# Altium PCB INVERTER_Logic_withCutout.pcbdoc
Units mm, origin at the board's own origin, x right, y up, seen from the top; angles counter-clockwise.
Board outline 118.77 x 58.36 mm, 2 copper layers (Top Layer, Bottom Layer), stack 1.66 mm thick; 158 components, 178 nets, 520 pads, 155 vias.
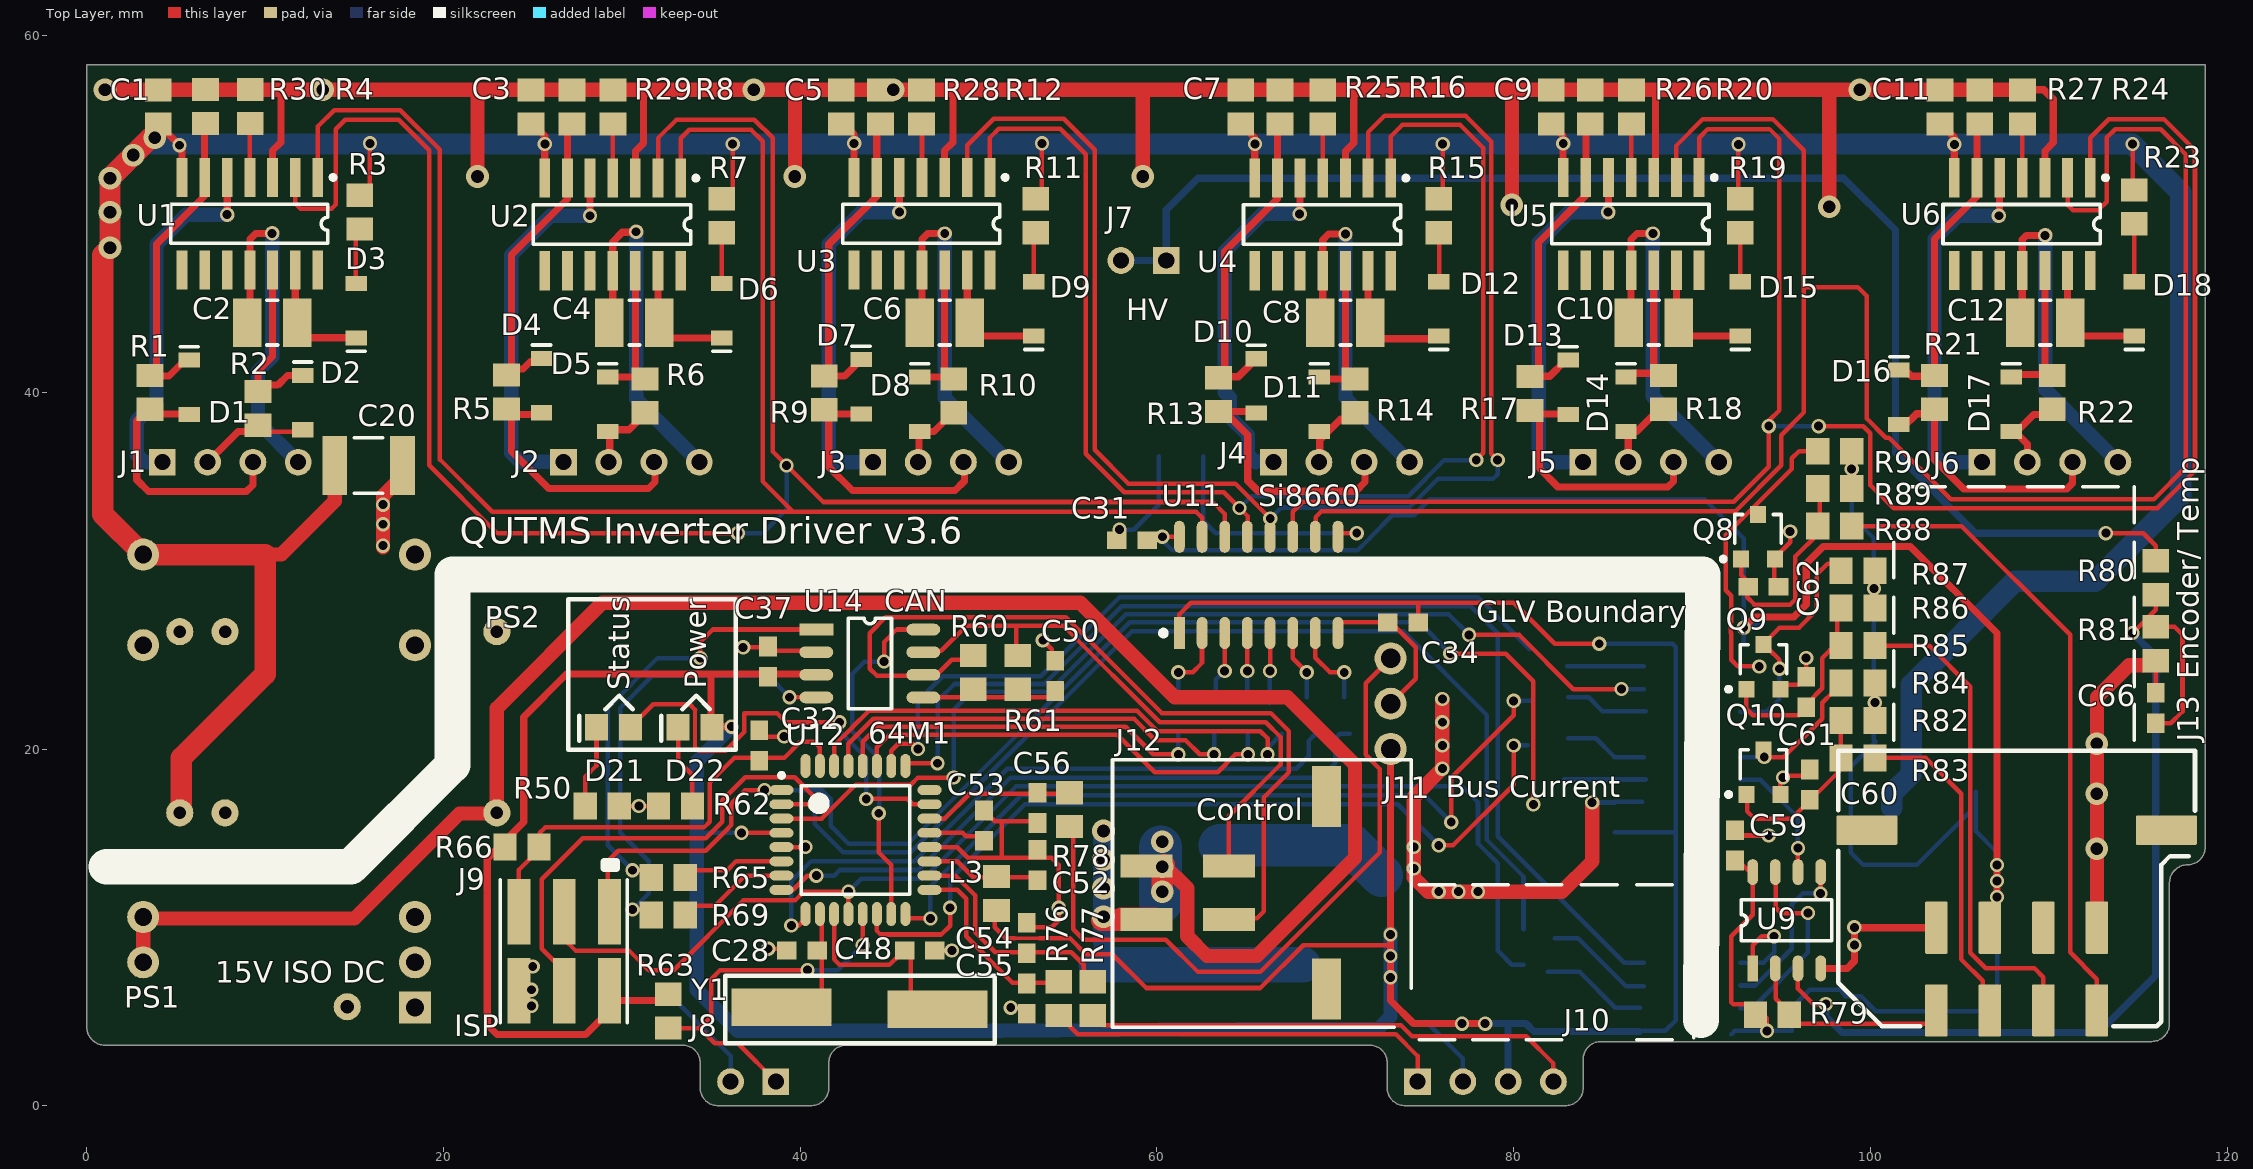
[diagram p0: Top Layer view]
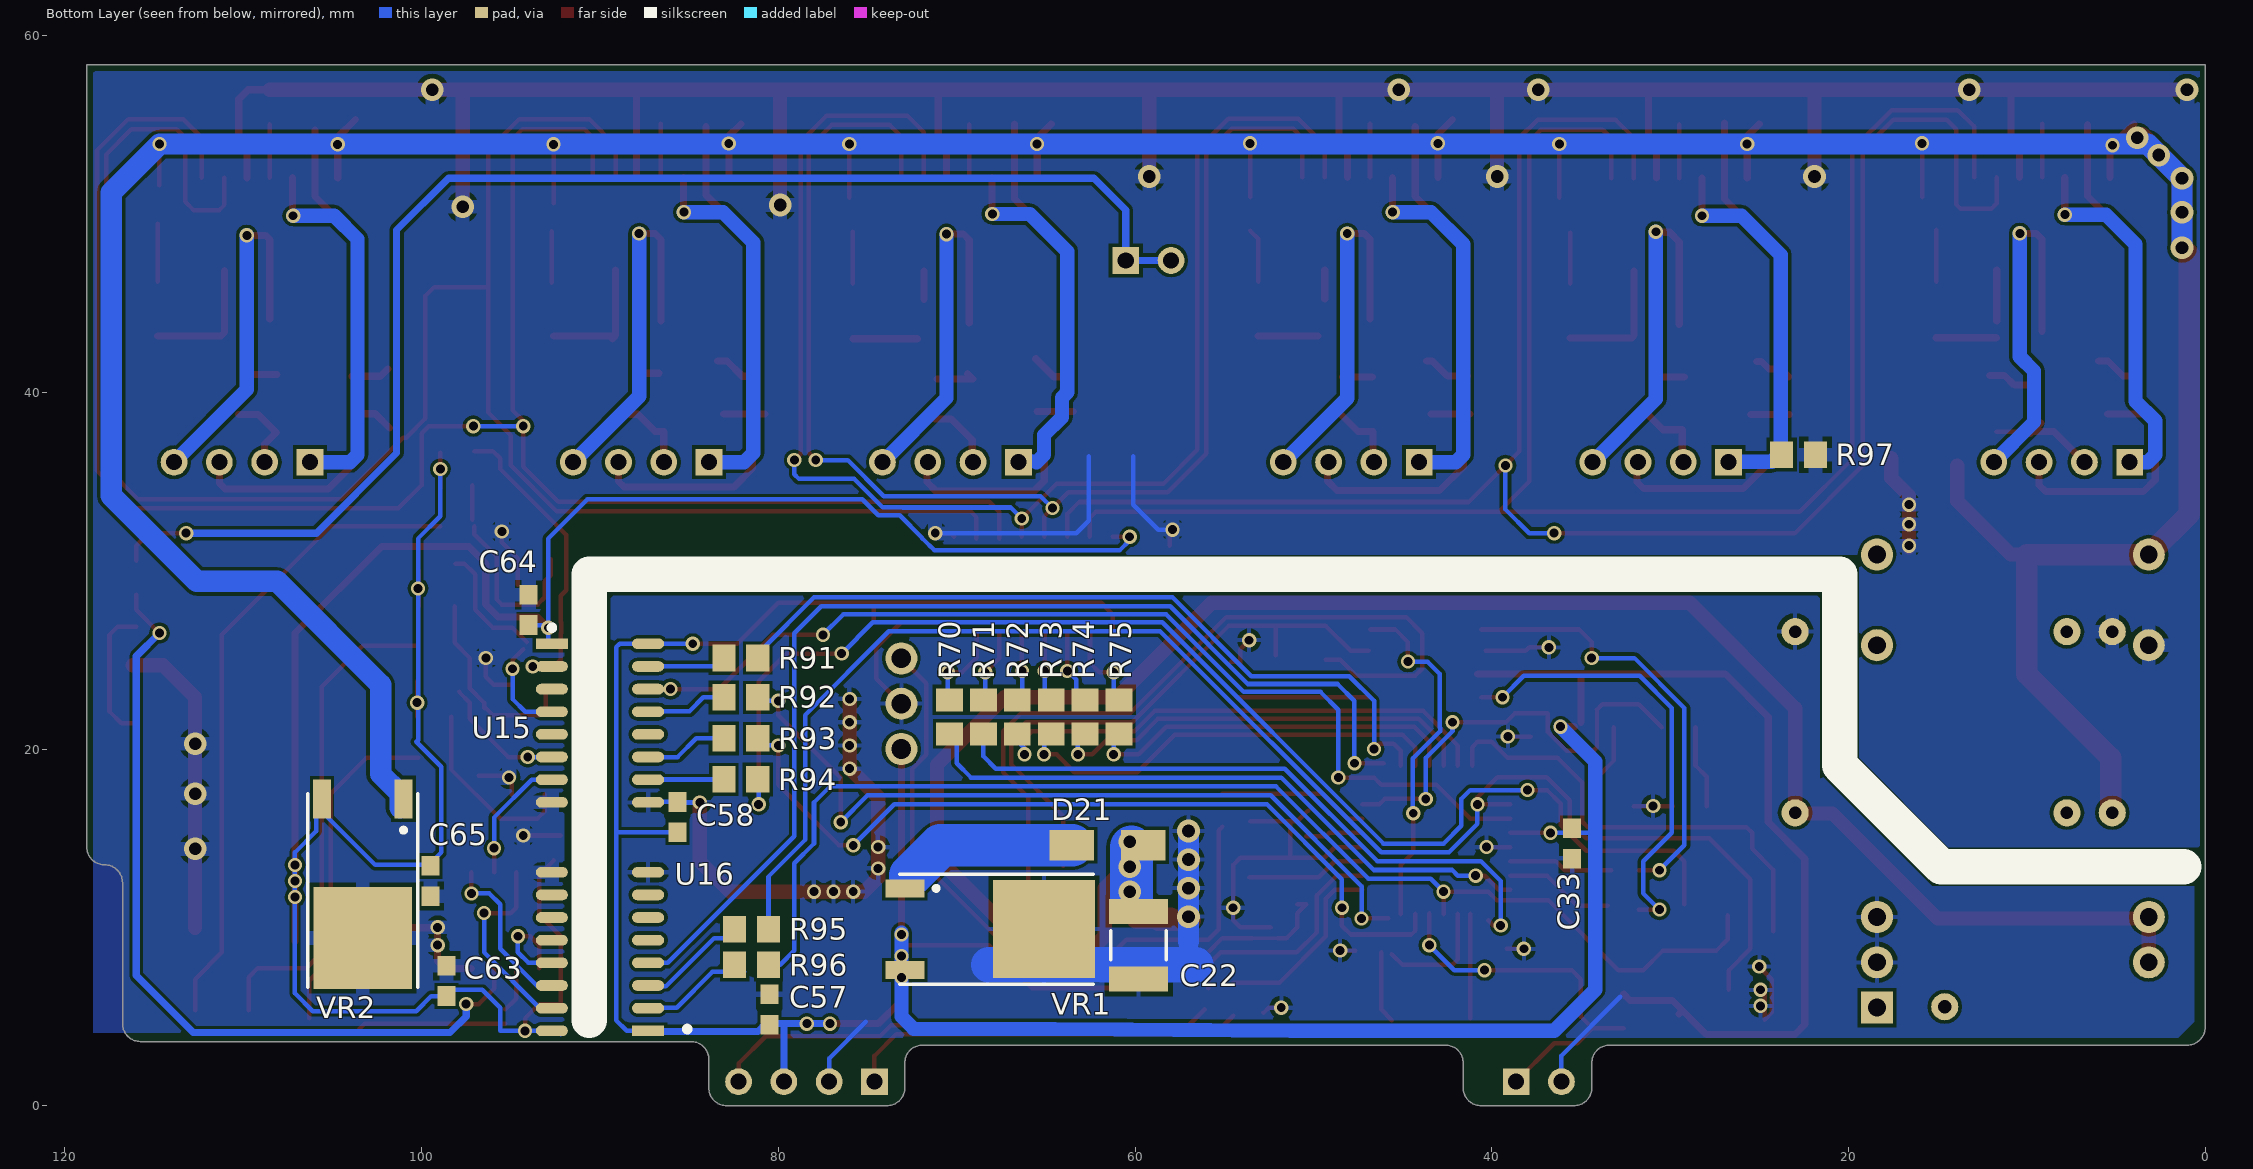
[diagram p1: Bottom Layer view, seen from below]

## Layer stack, top to bottom
Top Solder: solder mask 0.0102, Solder Resist, Dk 3.5
Top Layer: signal copper 0.07
Dielectric1: core 1.52, FR-4, Dk 4.8
Bottom Layer: signal copper 0.07
Bottom Solder: solder mask 0.0102, Solder Resist, Dk 3.5

## Board outline
34.39,1 ccw(c35.39,1) 35.39,0 40.6,0 ccw(c40.6,1) 41.6,1 41.6,2.4 cw(c42.6,2.4) 42.6,3.4 71.91,3.4 cw(c71.91,2.4) 72.91,2.4 72.91,1 ccw(c73.91,1) 73.91,0 82.9,0 ccw(c82.9,1) 83.9,1 83.9,2.6 cw(c84.9,2.6) 84.9,3.6 115.77,3.6 ccw(c115.77,4.6) 116.77,4.6 116.77,12.5 cw(c117.77,12.5) 117.77,13.5 ccw(c117.77,14.5) 118.77,14.5 118.77,58.36 0,58.36 0,4.4 ccw(c1,4.4) 1,3.4 33.39,3.4 cw(c33.39,2.4) 34.39,2.4

## Design rules (kind name [scope] priority, off if disabled: settings)
Clearance "Shrimp Clear" [InComponent('CS3')] p1: gap=1
Clearance [All] p2: gap=0.19
Height [All] p1: minheight=0 maxheight=30 prefheight=12.7
HoleSize [All] p1: absolutevalues=TRUE maxlimit=10 minlimit=0.025 maxpercent=80.000 minpercent=20.000
MinimumSolderMaskSliver [All] p1: minsoldermaskwidth=0.16
PlaneClearance [All] p1: clearance=1
PlaneConnect [All] p1: planeconnectstyle=Direct reliefexpansion=0.508 reliefentries=4 reliefconductorwidth=0.254 reliefairgap=0.254
PolygonConnect GLV_ground_connect [InNet('GND_GLV')] p1: connectstyle=Relief reliefconductorwidth=0.254 reliefentries=4 polygonreliefangle="90 Angle" airgapwidth=0.254
PolygonConnect "Rear Cap Connect" [(InNet('HV_NEG') AND (InComponent('C30') OR InComponent('C31') OR InComponent('C32') OR InComponent('C33') OR InComponent('C34') OR InComponent('C35') OR InComponent('C36') OR InComponent('C37') OR InComponent('C38') OR InComponent('C39') OR InComponent('C40') OR InComponent('C41') OR InComponent('C42') OR InComponent('C43') OR InComponent('C44') OR InComponent('C45') OR InComponent('C46') OR InComponent('C47') OR InComponent('C48') OR InComponent('C49') OR InComponent('C50') OR InComponent('C51') OR InComponent('C52') OR InComponent('C53') OR InComponent('C54') OR InComponent('C55') OR InComponent('C56') OR InComponent('C57')))] p2: connectstyle=Relief reliefconductorwidth=0.254 reliefentries=4 polygonreliefangle="90 Angle" airgapwidth=0.254
PolygonConnect [All] p3: connectstyle=Relief reliefconductorwidth=0.8 reliefentries=4 polygonreliefangle="90 Angle" airgapwidth=0.254
RoutingVias [All] p1: holewidth=0.5 width=0.8 viastyle="Through Hole" minholewidth=0.5 minwidth=0.8 maxholewidth=10 maxwidth=10
SilkToSilkClearance [All] p1: silktosilkclearance=0.16
SilkToSolderMaskClearance SilkscreenOverComponentPads [IsPad] p1: minsilkscreentomaskgap=0.16 clearancetoexposedcopper=TRUE
SolderMaskExpansion [IsVia] p1: expansion=-1
Width [All] p1: maxlimit=10 minlimit=0.2 preferedwidth=0.254
23 further rules are at their usual default settings.

## Components (designator, comment, footprint, x,y, rotation, side; value= is the part's Value field where it differs from the comment)
C1 "0805 1uF cer" 2012[0805]#1 4,56 r270 top
C2 "1210 3.3uF 50V" 3225[1210] 10.4,43.9 r180 top
C3 "0805 1uF cer" 2012[0805]#1 24.9,56 r270 top
C4 "1210 3.3uF 50V" 3225[1210] 30.7,43.9 r180 top
C5 "0805 1uF cer" 2012[0805]#1 42.3,56 r270 top
C6 "1210 3.3uF 50V" 3225[1210] 48.095,43.9 r180 top
C7 "0805 1uF cer" 2012[0805]#1 64.7,56 r270 top
C8 "1210 3.3uF 50V" 3225[1210] 70.565,43.9 r180 top
C9 "0805 1uF cer" 2012[0805]#1 82.1,56 r270 top
C10 "1210 3.3uF 50V" 3225[1210] 87.855,43.9 r180 top
C11 "0805 1uF cer" 2012[0805]#1 103.9,56 r270 top
C12 "1210 3.3uF 50V" 3225[1210] 109.8,43.9 r180 top
C20 "Comment" 1812 15.8,35.9 r0 top
C22 "1812 2.2uF 25V" 1812 59.8,9 r270 bottom
C28 "0603 18pF" 1608[0603] 40.1,8.7 r0 top
C31 "0603 18pF" 1608[0603] 58.6,31.7 r0 top
C32 "0603 18pF" 1608[0603] 37.7,20.2 r270 top
C33 "0603 18pF" 1608[0603] 35.5,14.7 r90 bottom
C34 "0603 18pF" 1608[0603] 73.8,27.1 r0 top
C37 "Comment" 1608[0603] 38.2,24.9 r270 top
C48 "0603 18pF" 1608[0603] 46.7,8.7 r0 top
C50 "Comment" 1608[0603] 54.3,24.1 r270 top
C52 "Comment" 1608[0603] 53.3,13.5 r270 top
C53 "Comment" 1608[0603] 50.3,15.7 r270 top
C54 "Comment" 1608[0603] 52.7,9.4 r270 top
C55 "Comment" 1608[0603] 52.7,6 r270 top
C56 "Comment" 1608[0603] 53.3,16.7 r270 top
C57 "Comment" 1608[0603] 80.5,5.4 r90 bottom
C58 "Comment" 1608[0603] 85.66,16.18 r270 bottom
C59 "Comment" 1608[0603] 92.4,14.6 r90 top
C60 "Comment" 1608[0603] 96.6,18 r270 top
C61 "Comment" 1608[0603] 96.4,23.2 r270 top
C62 "Comment" 1608[0603] 94,29.1 r180 top
C63 "Comment" 1608[0603] 98.6,7 r270 bottom
C64 "Comment" 1608[0603] 94,27.8 r270 bottom
C65 "Comment" 1608[0603] 99.5,12.6 r270 bottom
C66 "Comment" 1608[0603] 116,22.3 r270 top
D1 "RF071M2S" 0402 5.74,41.16 r270 top
D2 "RF071M2S" 0402 12.1,40.3 r270 top
D3 "RF071M2S" 0402 15.1,43.7 r90 top
D4 "RF071M2S" 0402 25.49,41.25 r270 top
D5 "RF071M2S" 0402 29.2,40.2 r270 top
D6 "RF071M2S" 0402 35.6,43.7 r90 top
D7 "RF071M2S" 0402 43.41,41.18 r270 top
D8 "RF071M2S" 0402 46.7,40.2 r270 top
D9 "RF071M2S" 0402 53.1,43.8 r90 top
D10 "RF071M2S" 0402 65.57,41.23 r270 top
D11 "RF071M2S" 0402 69.1,40.2 r270 top
D12 "RF071M2S" 0402 75.8,43.8 r90 top
D13 "RF071M2S" 0402 83.06,41.16 r270 top
D14 "RF071M2S" 0402 86.3,40.2 r270 top
D15 "RF071M2S" 0402 92.7,43.8 r90 top
D16 "RF071M2S" 0402 101.6,40.6 r270 top
D17 "RF071M2S" 0402 107.9,40.2 r270 top
D18 "RF071M2S" 0402 114.8,43.8 r90 top
D21 "Comment" 2012[0805]#2 62.8,14.6 r180 bottom
D21 "0805 Red LED" 2012[0805]#1 29.526,21.221 r0 top
D22 "0805 Grn LED" 2012[0805]#1 34.098,21.221 r0 top
J1 "A26416-ND" HDR1X4 4.23,36.08 r0 top locked
J2 "A26416-ND" HDR1X4 26.72,36.08 r0 top
J3 "A26416-ND" HDR1X4 44.07,36.08 r0 top
J4 "A26416-ND" HDR1X4 66.54,36.08 r0 top
J5 "A26416-ND" HDR1X4 83.88,36.08 r0 top
J6 "A26416-ND" HDR1X4 106.26,36.08 r0 top
J7 "A32932-ND" HDR1X2 60.52,47.39 r180 top locked
J8 "A32932-ND" HDR1X2 38.63,1.35 r180 top locked
J9 "ISP" SOT23-6 27,9.1 r180 top
J10 "A26416-ND" HDR1X4 74.61,1.35 r0 top locked
J11 "Bus Current" MOLEX_22-05-3081 73.1,20 r180 top locked
J12 "43045-0418" SO8 71.4,8.6 r90 top
J13 "Comment" MOLEX_8PIN_RA_SMD 108.2,10.4 r0 top
L3 "0805 10uH" 2012[0805]#1 51,11.9 r90 top
PS1 "15V ISO DC" DC/DC_JSE08 14.1,21.5 r270 top
PS2 "Comment" Recom_DIP24 18.4,5.5 r180 top
Q8 "2N7002" SOT-23 93.7,31.9 r0 top
Q9 "2N7002" SOT-23 94,24.6 r0 top
Q10 "2N7002" SOT-23 94,18.7 r0 top
R1 "0805 22R" 2012[0805]#1 3.54,40 r270 top
R2 "0805 22R" 2012[0805]#1 9.6,39.1 r90 top
R3 "0805 10R" 2012[0805]#1 15.3,50.1 r90 top
R4 "0805 100k" 2012[0805]#1 9.16,56.02 r90 top
R5 "0805 22R" 2012[0805]#1 23.53,40.02 r270 top
R6 "0805 22R" 2012[0805]#1 31.3,39.8 r90 top
R7 "0805 10R" 2012[0805]#1 35.6,49.9 r90 top
R8 "0805 100k" 2012[0805]#1 29.5,56 r90 top
R9 "0805 22R" 2012[0805]#1 41.35,39.97 r270 top
R10 "0805 22R" 2012[0805]#1 48.6,39.8 r90 top
R11 "0805 10R" 2012[0805]#1 53.2,49.9 r90 top
R12 "0805 100k" 2012[0805]#1 46.8,56 r90 top
R13 "0805 22R" 2012[0805]#1 63.45,39.87 r270 top
R14 "0805 22R" 2012[0805]#1 71.1,39.8 r90 top
R15 "0805 10R" 2012[0805]#1 75.8,49.9 r90 top
R16 "0805 100k" 2012[0805]#1 69.3,56 r90 top
R17 "0805 22R" 2012[0805]#1 80.92,39.93 r270 top
R18 "0805 22R" 2012[0805]#1 88.4,40 r90 top
R19 "0805 10R" 2012[0805]#1 92.7,49.9 r90 top
R20 "0805 100k" 2012[0805]#1 86.6,56 r90 top
R21 "0805 22R" 2012[0805]#1 103.6,40 r270 top
R22 "0805 22R" 2012[0805]#1 110.2,40 r90 top
R23 "0805 10R" 2012[0805]#1 114.8,50.4 r90 top
R24 "0805 100k" 2012[0805]#1 108.53,56 r90 top
R25 "0805 100k" 2012[0805]#1 66.9,56 r90 top
R26 "0805 100k" 2012[0805]#1 84.3,56 r90 top
R27 "0805 100k" 2012[0805]#1 106.13,56 r90 top
R28 "0805 100k" 2012[0805]#1 44.5,56 r90 top
R29 "0805 100k" 2012[0805]#1 27.2,56 r90 top
R30 "0805 100k" 2012[0805]#1 6.66,56.02 r90 top
R50 "Comment" 2012[0805]#1 28.9,16.8 r0 top
R60 "Comment" 2012[0805]#1 49.7,24.3 r270 top
R61 "Comment" 2012[0805]#1 52.2,24.3 r270 top
R62 "Comment" 2012[0805]#1 33,16.8 r180 top
R63 "0805 270R" 2012[0805]#1 32.6,5.3 r90 top
R65 "0805 270R" 2012[0805]#1 32.6,12.8 r180 top
R66 "0805 270R" 2012[0805]#1 24.4,14.5 r0 top
R69 "0805 270R" 2012[0805]#1 32.6,10.7 r180 top
R70 "Comment" 2012[0805]#1 70.4,21.8 r90 bottom
R71 "Comment" 2012[0805]#1 68.5,21.8 r90 bottom
R72 "Comment" 2012[0805]#1 66.6,21.8 r90 bottom
R73 "Comment" 2012[0805]#1 64.7,21.8 r90 bottom
R74 "Comment" 2012[0805]#1 62.8,21.8 r90 bottom
R75 "Comment" 2012[0805]#1 60.9,21.8 r90 bottom
R76 "Comment" 2012[0805]#1 54.5,6 r270 top
R77 "Comment" 2012[0805]#1 56.4,6 r270 top
R78 "Comment" 2012[0805]#1 55.1,16.6 r270 top
R79 "Comment" 2012[0805]#1 94.5,5.1 r180 top
R80 "Comment" 2012[0805]#1 116,29.6 r90 top
R81 "Comment" 2012[0805]#1 116,25.9 r90 top
R82 "Comment" 2012[0805]#1 99.3,21.6 r180 top
R83 "Comment" 2012[0805]#1 99.3,19.5 r180 top
R84 "Comment" 2012[0805]#1 99.3,23.7 r180 top
R85 "Comment" 2012[0805]#1 99.3,25.8 r180 top
R86 "Comment" 2012[0805]#1 99.3,27.9 r180 top
R87 "Comment" 2012[0805]#1 99.3,30 r180 top
R88 "Comment" 2012[0805]#1 98,32.5 r180 top
R89 "Comment" 2012[0805]#1 98,34.6 r180 top
R90 "Comment" 2012[0805]#1 98,36.7 r180 top
R91 "Comment" 2012[0805]#1 82.1,25.1 r180 bottom
R92 "Comment" 2012[0805]#1 82.1,22.9 r180 bottom
R93 "Comment" 2012[0805]#1 82.1,20.6 r180 bottom
R94 "Comment" 2012[0805]#1 82.1,18.3 r180 bottom
R95 "Comment" 2012[0805]#1 81.5,9.9 r180 bottom
R96 "Comment" 2012[0805]#1 81.5,7.9 r180 bottom
R97 "Comment" 2012[0805]#1 22.8,36.5 r180 bottom
U1 "FAN73933" SOIC16 8.51,49.45 r180 top
U2 "FAN73933" SOIC16 28.85,49.41 r180 top
U3 "FAN73933" SOIC16 46.19,49.45 r180 top
U4 "FAN73933" SOIC16 68.66,49.41 r180 top
U5 "FAN73933" SOIC16 85.95,49.44 r180 top
U6 "FAN73933" SOIC16 107.88,49.43 r180 top
U9 "MCP3002" MCP3002_SO8 93.4,7.7 r90 top
U11 "Si8660" SOP16_SINARROW 61.26,26.5 r90 top locked
U12 "64M1" 32A_L 43.1,14.9 r0 top locked
U14 "CAN" SOP8_TJA1040 40.9,26.7 r0 top
U15 "Si8661" SOP16_SINARROW 92.7,25.9 r180 bottom
U16 "Si8661" SOP16_SINARROW 87.3,4.2 r0 bottom
VR1 "78M05" 369A-13 68.8,9.9 r270 bottom
VR2 "78M05" 369A-13 103.3,13.1 r0 bottom
Y1 "16MHz ABLS" 2012[0805]#3 39.9,5.5 r0 top

## Footprints (in the part's own frame and the unit in brackets; to place one, negate y for a bottom-side part, rotate by r counter-clockwise, add the part's x,y. Pads: shape width x height; smd on the part's side, far side on the other; paste and mask are expansions set on the pad)
32A_L [mm] "Thin QFP, 32-Leads, Body 7x7mm, Pitch 0.8mm, IPC High Density"
  oval 1.35x0.55 smd: 1(-4.15,2.8) 2(-4.15,2) 3(-4.15,1.2) 4(-4.15,0.4) 5(-4.15,-0.4) 6(-4.15,-1.2) 7(-4.15,-2) 8(-4.15,-2.8) 17(4.15,-2.8) 18(4.15,-2) 19(4.15,-1.2) 20(4.15,-0.4) 21(4.15,0.4) 22(4.15,1.2) 23(4.15,2) 24(4.15,2.8)
  oval 0.55x1.35 smd: 9(-2.8,-4.15) 10(-2,-4.15) 11(-1.2,-4.15) 12(-0.4,-4.15) 13(0.4,-4.15) 14(1.2,-4.15) 15(2,-4.15) 16(2.8,-4.15) 25(2.8,4.15) 26(2,4.15) 27(1.2,4.15) 28(0.4,4.15) 29(-0.4,4.15) 30(-1.2,4.15) 31(-2,4.15) 32(-2.8,4.15)
  silkscreen extent -4.27,-3.05 3.05,3.75, body extent -3.5,-3.5 3.5,3.5, height 1.2
369A-13 [mm] "TO, Flat Index; 3 In-Line, Axial Leads; Body Dia. 4.6mm; Lead Dia. 0.5 mm (max)"
  rect 1x2.2 smd: 1(-2.285,-4.1) 3(2.285,-4.1)
  rect 5.5x5.7 smd: 4(0,3.7)
  silkscreen extent -3.09,-4.4 3.08,6.45
0402 [mm] "Chip Capacitor; Body 1.0 x 0.5 mm (LxW typ)"
  rect 0.85x1.2 smd: 1(-0.65,0) 2(2.4,0)
  silkscreen extent -1.4,-0.51 -1.4,0.51
1608[0603] [mm] "Chip Capacitor; Body 1.6 x 0.8 mm (LxW typ)"
  rect 1.1x1 smd: 1(-0.85,0) 2(0.85,0)
1812 [mm] "Chip Capacitor, Body 4.5x3.2mm, IPC High Density"
  rect 1.4x3.3 smd: 1(-1.9,0) 2(1.9,0)
  silkscreen extent -0.8,-1.55 0.8,1.55, body extent -2.4,-1.7 2.4,1.7, height 1.4
2012[0805]#1 [mm] "Chip Resistor; Body 2.0 x 1.3 mm (LxW typ)"
  rect 1.3x1.5 smd: 1(-0.95,0) 2(0.95,0)
2012[0805]#2 [mm] "Chip Resistor; Body 2.0 x 1.3 mm (LxW typ)"
  rect 2.5x1.7 smd: 1(-0.74,-0.004) 2(3.26,-0.004)
2012[0805]#3 [mm] "Crystal, Thru-Hole; 2 Leads; Body 3.1 x 8.2 mm (Dia.xH)"
  rect 5.6x2.1 smd: 1(-0.95,0.025) 2(7.8,-0.1)
3225[1210] [mm] "Chip Resistor; Body 3.2 x 2.5 mm (LxW typ)"
  rect 1.6x2.7 smd: 1(-1.4,0) 2(1.4,0)
  silkscreen extent -0.3,-1.25 0.3,1.25
DC/DC_JSE08 [mil]
  round 60 hole 27.56: 1(-200,350) 7(-200,-250) 8(-200,-350) 9(200,-350) 10(200,-250) 16(200,350)
  body extent -273,-470 272,470, height 319
HDR1X2 [mm] "Connector; Header; 2 Position"
  rect 1.5x1.5 hole 0.9: 1(0,0)
  round 1.5 hole 0.9: 2(2.54,0)
HDR1X4 [mm] "Connector; Header; 4 Position"
  rect 1.5x1.5 hole 0.9: 1(0,0)
  round 1.5 hole 0.9: 2(2.54,0) 3(5.08,0) 4(7.62,0)
MCP3002_SO8 [mm]
  rect 1.45x0.6 smd: 1(0,0)
  oval 1.45x0.6 smd: 2(0,-1.27) 3(0,-2.54) 4(0,-3.81) 5(5.4,-3.81) 6(5.4,-2.54) 7(5.4,-1.27) 8(5.4,0)
  silkscreen extent 1.56,-4.44 3.84,0.64, body extent -0.4,-4.4 5.8,0.6, height 1.75
MOLEX_8PIN_RA_SMD [mm]
  rrect10% 1.27x2.92 smd: 1(-4.5,-0.42) 2(-1.5,-0.42) 3(1.5,-0.42) 4(4.5,-0.42) 5(-4.5,-5.05) 6(-1.5,-5.05) 7(1.5,-5.05) 8(4.5,-5.05)
  rrect10% 3.43x1.65 smd: ""(-8.395,5.05) ""(8.395,5.05)
  silkscreen extent -10,-5.95 10,9.5, body extent -9.82,-5.77 9.83,9.63, height 8.78
MOLEX_22-05-3081 [mm]
  round 1.8 hole 1.1: 1(0,0) 2(0,-2.54) 3(0,-5.08)
  body extent -12.63,-6.27 0.3,1.2, height 6.38
Recom_DIP24 [mm] "945-1367-ND"
  rect 1.8x1.8 hole 1: 1(0,0)
  round 1.8 hole 1: 2(0,-2.54) 3(0,-5.08) 9(0,-20.32) 11(0,-25.4) 14(15.24,-25.4) 16(15.24,-20.32) 22(15.24,-5.08) 23(15.24,-2.54)
SO8 [mm] "SOP, 8-Leads, Body 5.3x5.3mm, Pitch 1.27mm, IPC High Density"
  rect 1.27x2.92 smd: 1(4.844,7.366) 2(1.844,7.366) 3(4.844,11.996) 4(1.844,11.996)
  rect 3.43x1.65 smd: ""(-2.051,1.896) ""(8.739,1.896)
  silkscreen extent -4.19,-2.87 10.79,13.9
SOIC16 [mm] "Small Outline; 16 Leads; Body Width 3.9 mm; Pitch 1.27 mm"
  rect 0.6x2.2 smd: 1(-4.445,-2.6) 2(-3.175,-2.6) 3(-1.905,-2.6) 4(-0.635,-2.6) 5(0.635,-2.6) 6(1.905,-2.6) 7(3.175,-2.6) 8(3.175,2.6) 9(1.905,2.6) 10(0.635,2.6) 11(-0.635,2.6) 12(-1.905,2.6) 13(-3.175,2.6) 14(-4.445,2.6)
  silkscreen extent -5.42,-2.72 3.81,1.1
SOP8_TJA1040 [mm]
  rect 1.9x0.65 smd: 1(0,0)
  oval 1.9x0.65 smd: 2(0,-1.27) 3(0,-2.54) 4(0,-3.81) 5(6,-3.81) 6(6,-2.54) 7(6,-1.27) 8(6,0)
  silkscreen extent 1.78,-4.44 4.22,0.64, body extent -0.17,-4.4 6.03,0.6, height 1.75
SOP16_SINARROW [mm]
  rect 1.8x0.6 smd: 1(0,0)
  oval 1.8x0.6 smd: 2(0,-1.27) 3(0,-2.54) 4(0,-3.81) 5(0,-5.08) 6(0,-6.35) 7(0,-7.62) 8(0,-8.89) 9(5.4,-8.89) 10(5.4,-7.62) 11(5.4,-6.35) 12(5.4,-5.08) 13(5.4,-3.81) 14(5.4,-2.54) 15(5.4,-1.27) 16(5.4,0)
  silkscreen extent -0.1,0.8 0.1,1, body extent -0.38,-9.54 5.78,0.54, height 2
SOT23-6 [mm] "SOT-23/SC-74A; 5 Leads; Body 3.1 x 3 mm, inc. leads (LxW max)"
  rect 1.27x3.68 smd: 1(-2.308,-1.78) 2(-2.308,2.66) 3(0.232,-1.78) 4(0.232,2.66) 5(2.772,-1.78) 6(2.772,2.66)
  silkscreen extent -3.3,-3.56 3.81,4.45
SOT-23 [mm] "SOT-23; 3 Leads; Body 3.0 x 2.6 mm, inc. leads (LxW max)"
  rect 0.9x0.95 smd: 1(-0.95,-1.25) 2(0.95,-1.25) 3(0,1.25)
  silkscreen extent -2.07,-1.37 1.3,1.25

## Part data
C20 C22: library part "Cap Pol3"
J1 J2 J3 J4 J5 J6 J10: library part "Header 4"
J7 J8: library part "Header 2"
J12: library part "SW DIP-4"
J13: library part 8_pin_header
PS1: library part DC_DC_JSE08
U11 U15 U16: library part Si-8660
U12: library part ATtiny28L-4AI
U14: library part TJA1040
Y1: library part "Res Semi"

## Free pads (board coordinates)
  round 1.524 hole 0.762: 0(14.6,5.55)

## Via types
v1: diameter 0.8, hole 0.5, Top Layer to Bottom Layer, 130 vias
v2: diameter 1.27, hole 0.711, Top Layer to Bottom Layer, 25 vias

## Nets (pads, with @x,y where several pads share a name; then routed paths per layer and width w, separated by ;. In a path a pad name is that pad's centre, name@x,y a point inside that pad or via, vN(x,y) a via of type N, cw(c..) or ccw(c..) an arc to the next point about the centre after c; other vN are vias at no path point)
5V_GLV: C33.2 C34.2 C37.2 C57.1 C58.2 D22.2 J9.2 J10.3 J11.1 L3.1 R63.2 R66.1 U11.1 U12.4 U14.3 U15.16 U16.1 VR1.3 | length 233.7
  Top Layer w0.2: 52.023,9.402 53.4,9.4
  Top Layer w0.254: D22.2@35,21.5 D22.2@35.048,21.548 ; v1(36.7,15.3) U12.4 ; L3.1@50.9,11.3 50.4,11.3 50.9,10.8 50.9,10 51.498,9.402 52.023,9.402 ; 53.4,9.4 55.1,9.4 56,8.5 57.5,8.5 59.4,6.6 65.8,6.6 68.2,9 73.1,9 ; U11.1 61.26,27.56 61.9,28.2 80,28.2 82.3,25.9 v1(84.8,25.9) ; C34.2 74.65,28.15
  Top Layer w0.4: J9.2@29.308,5.34 J9.2@29.5,5.148 ; R63.2 32.25,5.9 29.868,5.9 27.968,4 23,4 22.45,4.55 22.45,13.85 24.5,15.9 24.5,21.8 26.9,24.2 U14.3@40.8,24.2 ; D22.2@35,21.5 35,24.2 ; D22.2@35.351,21.251 v1(36.149,21.251) ; J11.1 73.1,5.9 74.4,4.6 v1(78.4,4.6)
  Bottom Layer w0.254: 34,15.3 v1(36.7,15.3) ; v1(84.8,25.9) 88.9,25.9 89.1,25.7 89.1,4.8 88.5,4.2 U16.1 ; C58.2 89.07,15.33
  Bottom Layer w0.4: v1(77.1,4.6) 79.69,4.6 ; J10.3@79.5,1.5 79.69,1.31 79.69,4.6 ; U16.1@87.06,4.16 81.14,4.16 80.7,4.6 79.69,4.6
  Bottom Layer w0.8: v1(36.149,21.251) 34.2,19.302 34.2,6.5 36.5,4.2 51.3,4.2 64.5,4.3 72.4,4.3 73.1,5 v1@73.1,9.7
  other v1: 73.1,7.2 73.1,8.4 73.1,9.6
5V_HV: C31.2 C59.1 C63.2 C64.2 C65.1 J13.2 R79.2 R82.1 R84.1 R86.1 R87.1 R89.1 R90.1 U9.8 U11.16 U15.1 U16.16 VR2.3 | length 157.8
  Top Layer w0.254: v1(60.3,31.9) U11.16 ; C59.1@92.6,13.75 93.4,12.95 93.4,10.7 92.2,9.5 92.2,5.8 92.3,5.7 93.4,5.7 94.2,4.9 v1@94.2,4 ; R89.1 R90.1@98.95,36.6 ; R86.1@100.15,28 R87.1@100.15,30 ; R82.1@100.25,21.8 R84.1@100.25,23.8
  Top Layer w0.4: v1(92.9,26.8) 93.5,27.4 95.7,27.4 96.4,28.1 96.4,30.4 97.36,31.36 102.24,31.36 107.1,26.5 J13.2@107.1,9.2
  Bottom Layer w0.254: v1(60.3,31.9) 60.3,31.7 60.844,31.156 71.256,31.156 71.483,31.383 71.497,31.383 71.917,31.803 71.917,31.817 73.2,33.1 74.4,33.1 75.3,34 90.7,34 92.9,31.8 v1(92.9,26.8) ; U16.16@92.21,4.01 92.4,4.2 95.6,4.2 95.6,5.5 96.6,6.5 98.3,6.5 C63.2@98.6,6.2 ; U15.1@92.9,26 92.9,26.604 93.246,26.95 C64.2 ; C63.2 99.45,6.15 100.3,5.3 106.1,5.3 107.1,6.3 107.1,14.2 105.9,15.4 VR2.3@105.9,17.6 ; v1(98.95,35.7) 98.95,33.05 100.2,31.8 100.2,20.5 100.3,20.4 98.9,19 98.9,14.2 99.6,13.5 102.6,13.5 VR2.3@105.5,16.4
  other v1: 94.2,4.2 107.1,11.7 107.1,12.6 107.1,13.5 100.25,22.6 100.2,29
12V_GLV: C22.1 D21.2@59.54,14.596 J12.3 PS1.16 PS2.22 PS2.23 | length 111.7
  Top Layer w0.8: PS2.23 3.16,10.66 3.32,10.5 15,10.5 20.89,16.39 22.99,16.39 22.99,22.29 28.9,28.2 55.7,28.2 61,22.9 67.317,22.9 71.1,19.117 71.1,13.9 65.6,8.4 62.8,8.4 61.7,9.5 61.7,12.2 J12.3@60.4,13.5
  Top Layer w1.2: v2(60.3,12) v2(60.3,13.4) J12.3@60.4,13.5
  Bottom Layer w2.4: C22.1@60.2,11.4 D21.2@60.2,14.5
  other v2: 60.3,14.8
12V_reg: D21.1@63.54,14.596 VR1.1 | length 9.8
  Bottom Layer w2.4: D21.1@63.54,14.6 70.9,14.6 72.6,12.9
15V: C1.2 C3.2 C5.2 C7.2 C9.2 C11.2 C20.1 PS1.9 PS2.14 R3.2 R7.2 R11.2 R15.2 R19.2 R23.2 U1.7 U2.7 U3.7 U4.7 U5.7 U6.7 VR2.1 | length 270.4
  Top Layer w0.254: R3.2@15.87,50.95 v1(15.87,53.96) ; R7.2@36.21,50.91 v1(36.21,53.92) ; R11.2@53.55,50.95 v1(53.55,53.96) ; R15.2@76.02,50.91 v1(76.02,53.92) ; R19.2@92.6,50.6 v1(92.6,53.9) ; R23.2@114.7,51.6 v1(114.7,53.92)
  Top Layer w0.4: C1.2 5.335,53.715 U1.7 ; C3.2@25,55.05 25.675,54.375 U2.7 ; C5.2@42.2,55.3 43.015,54.485 U3.7 ; C7.2 65.485,54.265 U4.7 ; C9.2 82.775,54.375 U5.7 ; C11.2@103.7,55.3 104.705,54.295 U6.7
  Top Layer w0.8: 0.9,33.2 3.2,30.9 10.9,30.9 13.9,33.9 C20.1
  Top Layer w1.2: 0.9,33.16 PS2.14 10,30.9 10,24.2 5.3,19.5 5.3,16.4 5.28,16.42 PS1.9 ; 0.9,33.2 0.9,47.7 v2(1.3,48.1) v2(1.3,52) 3.575,54.275 v2(3.8,54.275)
  Bottom Layer w1.2: v2(1.3,48.1) v2(1.3,52) 3.22,53.92 v1(65.49,53.92) 114.68,53.92 117.4,51.2 117.4,34.2 112.6,29.4 108.1,29.4 102.3,23.6 102.3,18.6 101.2,17.5 VR2.1@101.2,16.7
  other v1: 5.2,53.85 25.68,53.92 104.705,53.9 43.02,53.96 82.78,53.95
  other v2: 1.3,50.1 2.6,53.3
ADC_CS: U12.25 U16.4 | length 61.9
  Top Layer w0.254: U12.25@46.05,19.2 v1(47.7,19.2)
  Bottom Layer w0.254: v1(47.7,19.2) 47.7,22.7 48.644,23.644 53.672,23.644 58.028,28 77.6,28 79.1,26.5 79.1,15.1 86.19,8.01 U16.4
AGND: 
ANODE1: 
ANODE2: 
Aref: C53.2 U12.21 | length 3.2
  Top Layer w0.254: U12.21 49.1,15.3 49.3,15.1 C53.2@50.4,15.1
AVCC: C52.2 L3.2 U12.19 | length 6.7
  Top Layer w0.254: U12.19 48.8,13.7 49.7,12.8 C52.2@53.6,12.8
CAN_HI: J12.1 R61.1 U14.7 | length 33.2
  Top Layer w0.254: U14.7@46.9,25.5 47.9,25.5 49.3,26.9 54.758,26.9 60.158,21.5 66.1,21.5 66.928,20.672 66.928,19.128 64.034,16.234 J12.1 ; R61.1@52.1,25.25 52.1,26.8
CAN_LO: J12.2 R60.1 U14.6 | length 47.7
  Top Layer w0.254: R60.1@49.3,25 48.5,25 47.6,24.1 44.3,24.1 43.9,24.5 43.9,26.5 44.8,27.4 54.886,27.4 60.269,22.017 66.383,22.017 67.4,21 67.4,18.7 66,17.3 66,10.9 65.6,10.5 J12.2@63.6,10.5
CAN_SPLIT: C50.2 R60.2 R61.2 U14.5 | length 7.4
  Top Layer w0.254: U14.5 C50.2@54.3,22.89
CS_HV: U9.1 U16.13 | length 5.8
  Top Layer w0.254: U9.1 93.4,9 93.9,9.5 v1(94.6,9.5)
  Bottom Layer w0.254: U16.13 94.01,8.01 94.6,8.6 v1(94.6,9.5)
DTR_A: R4.1 U1.4 | length 3
  Top Layer w0.254: U1.4 R4.1@9.145,55.055
DTR_B: R8.1 U2.4 | length 3
  Top Layer w0.254: U2.4 R8.1@29.485,55.015
DTR_C: R12.1 U3.4 | length 3
  Top Layer w0.254: U3.4 R12.1@46.825,55.055
DTR_D: R16.1 U4.4 | length 3
  Top Layer w0.254: U4.4 R16.1@69.295,55.015
DTR_E: R20.1 U5.4 | length 3
  Top Layer w0.254: U5.4 R20.1@86.585,55.045
DTR_F: R24.1 U6.4 | length 3
  Top Layer w0.254: U6.4 R24.1@108.515,55.035
FBin: 
FBout: 
gate_U_HI_A: D2.2 J1.2 R2.1 | length 6.3
  Top Layer w0.254: R2.1@10,37.8 D2.2@11.7,37.8
  Top Layer w0.4: J1.2 8.49,37.8 9.6,37.8 R2.1@9.8,38 ; R2.1@9.22,38.28 R2.1@9.8,37.7
gate_U_HI_B: D5.2 J2.2 R6.1 | length 4.5
  Top Layer w0.4: J2.2@29.32,36.05 29.32,37.9 30.4,37.9 31.3,38.8 R6.1@31.3,39.1
gate_U_LO_A: D1.2 J1.3 R1.2 | length 14.5
  Top Layer w0.4: R1.2@3.3,38.79 D1.2@5.48,38.79 ; R1.2@3.395,38.995 2.8,38.4 2.8,35.1 3.46,34.44 8.94,34.44 9.31,34.81 J1.3
gate_U_LO_B: D4.2 J2.3 R5.2 | length 14.8
  Top Layer w0.4: R5.2@23.3,38.75 D4.2@25.49,38.75 ; R5.2@23.82,39.2 23.82,36.68 25.9,34.6 31.49,34.6 31.86,34.97 J2.3@31.86,36.05
gate_V_HI_A: D8.2 J3.2 R10.1 | length 3.8
  Top Layer w0.4: J3.2@46.66,36.09 D8.2@46.66,37.8 ; D8.2 47.5,37.8 R10.1@48.4,38.7
gate_V_HI_B: D11.2 J4.2 R14.1 | length 3.8
  Top Layer w0.4: J4.2@69.13,36.05 69.13,37.33 70.3,38.5 R14.1@71.2,38.5
gate_V_LO_A: D7.2 J3.3 R9.2 | length 14.8
  Top Layer w0.4: R9.2@41.23,38.79 D7.2@43.41,38.79 ; R9.2@41.6,39 41.6,35.82 42.93,34.49 48.68,34.49 49.2,35.01 J3.3@49.2,36.09
gate_V_LO_B: D10.2 J4.3 R13.2 | length 14.4
  Top Layer w0.4: R13.2 D10.2@65.48,38.92 ; R13.2@63.92,38.77 65.09,37.6 65.09,35.04 65.68,34.45 71.15,34.45 71.67,34.97 J4.3@71.67,36.05
gate_W_HI_A: D14.2 J5.2 R18.1 | length 3.9
  Top Layer w0.4: J5.2 D14.2@86.42,37.8 ; D14.2@86.5,37.8 86.9,37.8 87.87,38.77 R18.1@88.32,38.77
gate_W_HI_B: D17.2 J6.2 R22.1 | length 4.5
  Top Layer w0.4: J6.2 108.8,37.1 108.15,37.75 109.16,38.76 R22.1@110.25,38.76
gate_W_LO_A: D13.2 J5.3 R17.2 | length 14.2
  Top Layer w0.4: R17.2@80.75,38.78 D13.2@83.06,38.78 ; R17.2@81.44,38.51 81.44,35.73 82.47,34.7 88.66,34.7 88.96,35 J5.3
gate_W_LO_B: D16.2 J6.3 R21.2 | length 14.6
  Top Layer w0.4: D16.2@101.8,38 102.6,38.8 103.7,38.8 103.6,38.7 103.6,36.2 105.23,34.57 111.01,34.57 111.34,34.9 J6.3
gearbox_temp_a: 
gearbox_temp_b: J13.5 R79.1 U9.2 | length 10.8
  Top Layer w0.254: U9.2@94.7,7.67 94.7,6 R79.1@95.3,5.4 ; R79.1@95.3,4.6 103.2,4.6 J13.5@103.5,4.3
GND_A: J1.1 U1.5 | length 20.6
  Top Layer w0.4: v1@7.875,49.975 U1.5
  Bottom Layer w0.8: J1.1 3.22,36.08 2.8,36.5 2.8,38.4 3.9,39.5 3.9,48.3 5.56,49.96 v1(7.87,49.96)
GND_B: J2.1 R97.1 U2.5 | length 21.7
  Top Layer w0.4: J2.1@26.7,36.1 J2.1 ; v1(28.215,49.9) U2.5
  Bottom Layer w0.8: J2.1@26.7,36.1 24.3,36.1 23.8,36.6 23.8,47.7 26,49.9 v1@28.2,49.9
GND_C: J3.1 U3.5 | length 21.1
  Top Layer w0.4: v1(45.555,50.1) U3.5
  Bottom Layer w0.8: J3.1 42.02,36.08 41.6,36.5 41.6,48.3 43.4,50.1 v1(45.555,50.1)
GND_D: J4.1 U4.5 | length 20.5
  Top Layer w0.4: v1@68.025,50 U4.5
  Bottom Layer w0.8: J4.1@66.4,36.3 65.52,36.08 65.1,36.5 65.1,37.6 64.1,38.6 64.1,39.7 63.8,40 63.8,47.9 65.9,50 v1(68,50)
GND_E: J5.1 U5.5 | length 21
  Top Layer w0.4: v1@85.315,50.1 U5.5
  Bottom Layer w0.8: J5.1 81.92,36.08 81.4,36.6 81.4,48.4 83.1,50.1 v1(85.3,50.1)
GND_F: J6.1 U6.5 | length 21.2
  Top Layer w0.4: v1@107.245,49.9 U6.5
  Bottom Layer w0.8: J6.1 104.02,36.08 103.6,36.5 103.6,48.6 104.9,49.9 v1(107.2,49.9)
GND_GLV: C22.2 C28.1 C32.1 C33.1 C34.1 C37.1 C48.2 C50.1 C52.1 C53.1 C54.1 C55.2 C56.2 C57.2 C58.1 J8.2 J9.6 J10.2 J11.2 J12.4 PS1.1 PS2.2 PS2.3 R50.2 R62.2 U11.8 U12.5 U12.20 U14.2 U15.9 U16.8 VR1.4 | length 105.6
  Top Layer w0.254: v1(24.928,6.5) 24.7,6.272 24.7,4.828 24.3,5.228 24.3,7.1 v1(25,7.8) ; R50.2 R62.2 ; v1(36.8,25.7) 37.9,25.7 38.1,25.5 U14.2@40.33,25.5 ; C32.1@37.8,20.7 v1(39.1,20.7) ; v1(38.2,8.8) C28.1@39.15,8.8 ; U12.5 v1(40.3,14.5) ; U12.20 48.8,14.5 49.4,13.9 54.1,13.9 54.5,13.5 v1(54.5,11.1) 54.5,10.4 54.1,10 C54.1@52.4,10 ; C48.2@47.65,8.7 v1(48.5,8.7) ; C53.1 50.9,15.95 C56.2@53.55,15.95 ; 51.3,13.9 51.3,15.95 ; v1(51.8,5.5) 52.5,5.5 C55.2@52.8,5.2 ; v1(53.6,26.1) 54.1,25.6 54.1,24.8 54.2,24.9 C50.1@54.6,24.9 ; U11.8@70.1,27.1 73.1,27.1 74.5,25.7 74.5,23.94 J11.2
  Top Layer w0.8: v1(76,22.8) v1(76,18.9) 74.4,17.3 74.4,12.8 75.2,12 82.7,12 84.4,13.7 v1(84.4,17)
  Top Layer w1.2: v2@56.9,10.4 J12.4@58.7,10.4 ; J12.4@58,10.5 J12.4@59.9,10.5
  Bottom Layer w0.254: 32.8,6.1 36.09,2.81 J8.2 ; 75.1,4.7 77.15,2.65 J10.2 ; v1(84.4,17) C58.1@85.66,17 ; C58.1 U15.9@87.22,17.03
  Bottom Layer w1.2: 57,9.2 v2(57,15.4)
  Bottom Layer w2: 56.6,7.9 68.2,7.9
  other v1: 24.928,5.6 75.8,12 76.9,12 78,12 74.4,13.3 74.4,14.5 30.95,16.8 76,20.2 76,21.5
  other v2: 57,10.6 57,12.2 57,13.8
GND_HV: C1.1 C3.1 C5.1 C7.1 C9.1 C11.1 C20.2 C31.1 C59.2 C60.1 C61.1 C62.1 C63.1 C64.1 C65.2 C66.1 J13.1 J13.4 PS1.8 PS2.16 Q8.2 Q9.2 Q10.2 R4.2 R8.2 R12.2 R16.2 R20.2 R24.2 R25.2 R26.2 R27.2 R28.2 R29.2 R30.2 R81.1 R97.2 U1.3 U2.3 U3.3 U4.3 U5.3 U6.3 U9.4 U11.9 U15.8 U16.9 VR2.4 | length 230.6
  Top Layer w0.254: v1(57.9,32.3) 58.05,32.15 C31.1@58.05,31.4 ; U11.9 70.35,32.1 v1(71.2,32.1) ; C59.2@92.2,15.15 v1(94.3,15.15) ; C62.1@94.6,29.2 94.6,30.7 95.5,31.6 v1(95.5,32.2) ; Q9.2@94.9,23.6 95.95,23.6 C61.1 v1(96.4,25.1) ; Q10.2 94.95,18.25 95.2,18.5 C60.1@96.8,18.5 ; C66.1 R81.1
  Top Layer w0.4: U1.3 10.415,53.555 10.88,54.02 10.88,56.97 ; U2.3 30.755,53.515 31.22,53.98 31.22,56.97 ; U3.3 48.095,53.555 48.56,54.02 48.56,56.97 ; U4.3 70.565,53.515 71.03,53.98 71.03,56.97 ; U5.3@87.955,52.04 87.955,56.86 ; U9.4 98.7,7.7 99.1,8.1 99.1,9.98 J13.1 ; R24.2@108.53,56.96 109.72,56.96 110.25,56.43 110.25,54 109.785,53.535 U6.3
  Top Layer w0.8: v2@1,56.96 21.9,56.96 ; v1@16.6,31.3 16.6,34.2 17.6,35.2 C20.2@17.6,36.3 ; v2(21.9,52.1) 21.9,56.96 ; v2(39.7,52.1) 39.7,56.9 ; v2(59.2,52.1) 59.2,56.8 ; v2(79.9,50.5) 79.9,56.86 ; v2(97.7,50.4) 97.7,56.96 ; R24.2@108.53,56.96 21.9,56.96 ; J13.4 112.7,22.9 114.5,24.7 R81.1@116.2,24.7
  Bottom Layer w0.254: v1(57.9,32.3) 58.7,32.3 60.1,33.7 60.1,36.4 ; 62.6,36.4 62.6,32.8 63.3,32.1 v1(71.2,32.1)
  other v1: 99.1,9 99.1,10 95.1,18.4 16.6,31.4 16.6,32.6 16.6,33.7
  other v2: 112.7,14.4 112.7,17.5 112.7,20.3 1.02,56.96 13.22,56.96 37.4,56.96 45.22,56.96 99.4,56.96
H_in_A: 
H_in_B: 
H_in_C: 
H_in_D: 
H_in_E: 
H_in_F: 
H_in_U: U1.1 U2.1 U11.15 | length 108.9
  Top Layer w0.254: U1.1 12.955,54.905 13.87,55.82 17.58,55.82 19.8,53.6 19.8,36.228 22.728,33.3 46.182,33.3 ; U2.1 33.295,54.245 33.78,54.73 37.24,54.73 37.9,54.07 37.9,35 39.59,33.31 62.19,33.31 62.53,32.97 U11.15
H_in_V: U3.1 U4.1 U11.13 | length 77.3
  Top Layer w0.254: U3.1 50.635,54.285 51.12,54.77 54.58,54.77 56,53.35 56,36.559 58.169,34.39 63.75,34.39 65.08,33.06 U11.13@65.08,31.9 ; U4.1 73.105,54.345 73.75,54.99 77.01,54.99 78.3,53.7 78.3,36.62 77.9,36.22 v1(77.9,36.2)
  Bottom Layer w0.254: v1(64.63,33.51) 65.3,34.18 74.08,34.18 76.1,36.2 v1(77.9,36.2)
H_in_W: U5.1 U6.1 U11.11 | length 110.6
  Top Layer w0.254: U11.11@67.62,31.8 67.62,33.3 68.18,33.86 92.332,33.86 94.3,35.828 94.3,38.4 94.9,39 94.9,54.2 94.34,54.76 90.88,54.76 90.395,54.275 U5.1 ; v1(97.1,38.1) 99.599,38.1 100,37.699 100,34.8 101.3,33.5 116.1,33.5 118.2,35.6 118.2,53.57 116.46,55.31 113.37,55.31 112.325,54.265 U6.1
  Bottom Layer w0.254: v1(94.3,38.1) v1(97.1,38.1)
H_out_A: D2.1 R2.2 U1.12 | length 9.5
  Top Layer w0.4: U1.12 10.415,42.015 9.6,41.2 9.6,40.5 9.7,40.4 10.7,40.4 11.25,40.95 D2.1
H_out_B: D5.1 R6.2 U2.12 | length 7.8
  Top Layer w0.4: D5.1 R6.2@30.75,40.85 ; R6.2@30.755,40.6 U2.12
H_out_C: D8.1 R10.2 U3.12 | length 8.1
  Top Layer w0.4: D8.1 R10.2@48.35,40.85 ; R10.2@48.095,40.4 U3.12
H_out_D: D11.1 R14.2 U4.12 | length 8.7
  Top Layer w0.4: D11.1@69.39,41.04 69.1,40.75 R14.2 ; R14.2@70.565,40.5 U4.12
H_out_E: D14.1 R18.2 U5.12 | length 6.9
  Top Layer w0.4: D14.1@86.68,41.07 87.855,41.07 U5.12
H_out_F: D17.1 R22.2 U6.12 | length 7.5
  Top Layer w0.4: D17.1@108.1,41 R22.2@109.585,41 ; R22.2@109.785,40.8 U6.12
hall_1: J13.8 R88.1 | length 36.4
  Top Layer w0.254: R88.1 105.1,32.5 111.2,26.4 111.2,8.6 112.7,7.1 J13.8
hall_2: J13.7 R85.1 | length 27.7
  Top Layer w0.254: R85.1 103.3,25.8 105.6,23.5 105.6,8.574 106.474,7.7 109.2,7.7 109.7,7.2 J13.7
hall_3: J13.6 R83.1 | length 18.8
  Top Layer w0.254: R83.1@100.2,19.5 103.1,19.5 105.1,17.5 105.1,8.2 106.3,7 J13.6@106.3,4.9
hall_5v: 
hall_gnd: 
Hall_Link1: C62.2 Q8.1 R88.2 R89.2 | length 11.9
  Top Layer w0.254: Q8.1 92.75,29.75 93.1,29.4 93.1,28.5 93.5,28.1 95.5,28.1 95.8,28.4 95.8,30.8 97.05,32.05 R88.2 ; R88.2@97.15,32.85 R89.2@97.15,34.8
Hall_Link2: C61.2 Q9.1 R85.2 R86.2 | length 11.2
  Top Layer w0.254: Q9.1 93.05,22.25 93.4,21.9 96,21.9 96.4,22.3 96.5,22.3 96.5,22.6 97.3,23.4 97.3,25.1 98.15,25.95 R86.2@98.15,28
Hall_Link3: C60.2 Q10.1 R82.2 R83.2 | length 10.5
  Top Layer w0.254: Q10.1@93.1,17.45 93.1,16.5 93.5,16.1 95.6,16.1 98.35,18.85 R82.2@98.35,21.8
HV_DIV: C66.2 R80.1 R81.2 U9.3 | length 54.1
  Top Layer w0.254: U9.3 95.94,6.56 96.8,5.7 v1(97.5,5.7) ; v1(114.7,26.5) 116,27.8 R80.1 ; C66.2 116.85,21.45 117.5,22.1 117.5,26.4 117.05,26.85 R81.2
  Bottom Layer w0.4: v1(97.5,5.7) 97.5,5 98.4,4.1 112.8,4.1 116,7.3 116,25.2 v1(114.7,26.5)
HV_NEG: 
HV_POS: J7.1 J7.2 R80.2 | length 78
  Top Layer w0.254: v1(113.2,32.1) 115.3,32.1 116,31.4 R80.2
  Bottom Layer w0.4: J7.2 60.09,47.39 60.52,47.82 60.52,50.22 62.3,52 98.5,52 101.4,49.1 101.4,36.6 105.9,32.1 v1(113.2,32.1)
HV_SHUNT: 
INT0: R93.2 U12.14 | length 46.6
  Top Layer w0.254: U12.14 44.3,9.8 44.5,9.6 47.9,9.6 48.4,10.1 v1(48.4,11.1) ; v1(75.8,14.6) 76.6,14.6 80,18 v1(80,20.2)
  Bottom Layer w0.254: v1(48.4,11.1) 48.4,12.7 52.6,16.9 73.5,16.9 v1(75.8,14.6) ; v1(80,20.2) R93.2@80.8,20.2
INT0_HV: Q10.3 R84.2 U15.6 | length 7.2
  Top Layer w0.254: v1(94.05,19.55) 95.15,19.55 97.3,21.7 97.3,22.6 R84.2@97.9,23.2
  Bottom Layer w0.254: U15.6 v1(94.05,19.55)
INT0_link: R93.1 U15.11 | length 4.7
  Bottom Layer w0.254: R93.1 84.6,20.6 85.65,19.55 U15.11
INT1: R92.2 U12.16 | length 44.4
  Top Layer w0.254: U12.16@45.8,10.5 v1(47.3,10.5) ; v1(76.5,15.9) 76.5,18.386 80,21.886 v1(80,22.7)
  Bottom Layer w0.254: v1(47.3,10.5) 47.3,12.3 52.4,17.4 75,17.4 v1(76.5,15.9) ; v1(80,22.7) R92.2@80.95,22.7
INT1_HV: Q9.3 R87.2 U15.4 | length 12.5
  Top Layer w0.254: Q9.3@94.1,26 94.9,26.8 96,26.8 97,27.8 97,29.8 97.6,30.4 R87.2@98.1,30.4 ; Q9.3@94.3,25.6 94.9,25 v1(94.9,24.5)
  Bottom Layer w0.254: U15.4 94.19,22.09 94.9,22.8 v1(94.9,24.5)
INT1_link: R92.1 U15.13 | length 4.7
  Bottom Layer w0.254: R92.1 84.2,22.9 84.98,22.12 U15.13@87.4,22.12
INT2: R91.2 U12.26 | length 43.4
  Top Layer w0.254: U12.26 45.1,19.9 45.5,20.3 46.3,20.3 v1(46.6,20)
  Bottom Layer w0.254: v1@46.683,19.917 v1(46.6,20) 46.6,22.7 47.988,24.088 53.488,24.088 57.9,28.5 78,28.5 R91.2@80.9,25.6
INT2_HV: Q8.3 R90.2 U15.2 | length 17.4
  Top Layer w0.254: v1(93.77,24.63) 92.57,24.63 92.2,25 92.2,26.486 92.183,26.503 92.183,27.097 92.2,27.114 92.2,28.6 91.9,28.9 91.9,32 95.6,35.7 95.6,36.3 96,36.7 R90.2
  Bottom Layer w0.254: U15.2 v1(93.77,24.63)
INT2_link: R91.1 U15.15 | length 4.3
  Bottom Layer w0.254: R91.1@83,24.63 U15.15
INT)_link: 
L_in_A: 
L_in_B: 
L_in_C: D9.2 R11.1 | length 3
  Top Layer w0.254: D9.2 53.1,48.6 R11.1@53.55,49.05
L_in_D: 
L_in_E: 
L_in_F: 
L_in_U: U1.2 U2.2 U11.14 | length 111.8
  Top Layer w0.254: U1.2 11.685,50.595 11.98,50.3 13.72,50.3 13.95,50.53 13.95,54.75 14.48,55.28 17.492,55.28 19.2,53.572 19.2,35.9 23,32.1 v1(36.5,32.1) ; U2.2 32.025,54.255 33.06,55.29 37.43,55.29 38.45,54.27 38.45,36.68 41.28,33.85 63.14,33.85 63.81,33.18 U11.14@63.81,31.9
  Bottom Layer w0.254: v1(36.5,32.1) 37.9,32.1 39.23,33.43 v1(39.23,35.9)
L_in_V: U3.2 U4.2 U11.12 | length 82.6
  Top Layer w0.254: U3.2 49.365,53.845 50.85,55.33 54.77,55.33 56.51,53.59 56.51,36.77 58.397,34.883 64.387,34.883 v1(66.35,32.92) U11.12@66.35,31.9 ; U4.2 71.835,54.575 72.76,55.5 77.3,55.5 78.744,54.056 78.744,36.556 v1(79.1,36.2)
  Bottom Layer w0.254: v1(66.35,32.92) 66.97,33.54 73.012,33.54 73.016,33.544 74.144,33.544 75.74,35.14 78.84,35.14 79.1,35.4 v1(79.1,36.2)
L_in_W: U5.2 U6.2 U11.10 | length 118.5
  Top Layer w0.254: U11.10@68.89,31.8 68.89,33 69.21,33.32 92.42,33.32 95,35.9 95,37.6 96.27,38.87 96.27,53.58 94.53,55.32 90.61,55.32 89.125,53.835 U5.2 ; 96.3,45.9 99.3,45.9 99.8,45.4 99.8,38.527 100.869,37.458 101.042,37.458 104.5,34 115.9,34 117.69,35.79 117.69,53.33 116.27,54.75 113.72,54.75 113.26,54.29 113.26,50.69 112.79,50.22 111.34,50.22 111.055,50.505 U6.2
L_out_A: D1.1 R1.1 R30.1 U1.6 | length 17.6
  Top Layer w0.4: D1.1@5.97,41.76 5.45,41.76 4.6,40.91 3.9,40.91 3.9,48.3 6.605,51.005 R30.1@6.605,55
L_out_B: D4.1 R5.1 R29.1 U2.6 | length 18.1
  Top Layer w0.4: D4.1@25.16,41.72 24.87,41.72 24.45,41.3 23.8,41.3 23.37,40.87 23.8,40.87 23.8,47.7 26.945,50.845 R29.1@26.945,55.1
L_out_C: D7.1 R9.1 R28.1 U3.6 | length 17.8
  Top Layer w0.4: D7.1@43.65,41.76 43.34,41.76 42.49,40.91 41.36,40.91 41.6,41.15 41.6,48.3 44.285,50.985 R28.1@44.285,54.9
L_out_D: D10.1 R13.1 R25.1 U4.6 | length 17.6
  Top Layer w0.4: D10.1 64.56,40.87 63.8,40.87 63.8,47.9 66.755,50.855 R25.1@66.755,55.03
L_out_E: D13.1 R17.1 R26.1 U5.6 | length 17.5
  Top Layer w0.4: D13.1@83.41,41.75 82.87,41.75 82.02,40.9 81.4,40.9 81.4,48.4 84.045,51.045 R26.1@84.045,54.9
L_out_F: D16.1 R21.1 R27.1 U6.6 | length 17.2
  Top Layer w0.4: D16.1@101.9,41.3 102.3,40.9 103.89,40.9 103.88,40.89 103.6,40.89 103.6,48.6 105.975,50.975 R27.1@105.975,54.7
LED1: D21.2@30.476,21.221 U12.23 | length 24.8
  Top Layer w0.2: 34.1,20.1 34.1,22.2
  Top Layer w0.254: D21.2@30.476,21.221 31.755,22.5 33.8,22.5 34.1,22.2 ; 34.1,20.1 34.3,19.9 35.812,19.9 36.866,20.954 36.866,22 38.7,22 39.2,21.5 v1(42.2,21.5) ; v1(43.7,17.2) 46,17.2 46.3,16.9 U12.23
  Bottom Layer w0.254: v1(42.2,21.5) 42.2,21 43.7,19.5 v1(43.7,17.2)
LED_link_1: D21.1@28.576,21.221 R50.1 | length 4.7
  Top Layer w0.254: R50.1 27.95,18.45 28.576,19.076 D21.1@28.576,21.221
LED_link_2: D22.1 R62.1 | length 4.8
  Top Layer w0.254: D22.1 33.148,19.352 33.95,18.55 R62.1
LINK_A: D3.2 R3.1 | length 2.9
  Top Layer w0.254: D3.2@15.07,46.21 R3.1@15.07,49.1
LINK_B: D6.2 R7.1 | length 2.8
  Top Layer w0.254: D6.2 R7.1
LINK_C: 
LINK_D: D12.2 R15.1 | length 2.9
  Top Layer w0.254: D12.2@75.82,46.1 R15.1@75.82,49.01
LINK_E: D15.2 R19.1 | length 2.9
  Top Layer w0.254: D15.2@92.71,46.13 R19.1@92.71,49.04
LINK_F: D18.2 R23.1 | length 3.2
  Top Layer w0.254: D18.2 R23.1
MISO: J9.1 R94.2 U12.1 | length 74.5
  Top Layer w0.254: J9.1@29.2,11.3 29.2,13.7 29.8,14.3 34.7,14.3 35.983,15.583 35.983,15.597 36.125,15.739 36.125,16.925 36.9,17.7 U12.1 ; v1(76.45,25.35) 79.55,25.35 81.1,23.8 v1(81.1,16.9)
  Bottom Layer w0.254: v1(38,17.7) 41.2,17.7 41.7,17.2 41.7,15.7 42.7,14.7 46.072,14.7 58.472,27.1 74.7,27.1 v1(76.45,25.35) ; v1(81.1,16.9) R94.2@81.1,18.25
MISO_HV: U9.6 U15.7 | length 7.2
  Top Layer w0.254: U9.6 v1(95.94,14.44)
  Bottom Layer w0.254: U15.7 93.82,18.28 95.94,16.16 v1(95.94,14.44)
MISO_link: R94.1 U15.10 | length 4.6
  Bottom Layer w0.254: R94.1@82.8,18.29 U15.10@87.4,18.29
MOSI: J9.4 R95.2 U12.2 | length 87.2
  Top Layer w0.254: J9.4@26.7,6.5 26.7,7.6 25.5,8.8 25.5,12.7 27.8,15 34.7,15 35.625,15.925 35.625,17.125 36.917,18.417 39.683,18.417 40.8,17.3 v1(40.8,16.9) U12.2
  Bottom Layer w0.254: v1(40.8,16.9) 40.8,15.8 42.397,14.203 46.203,14.203 58.6,26.6 73.8,26.6 78.5,21.9 78.5,14.9 80.55,12.85 R95.2
MOSI_HV: U9.5 U16.14 | length 9.3
  Top Layer w0.254: v1@97.21,11.9 U9.5
  Bottom Layer w0.254: U16.14 93.54,6.74 95.6,8.8 95.6,11.3 96.2,11.9 v1(97.2,11.9)
MOSI_link: R95.1 U16.3 | length 6.1
  Bottom Layer w0.254: R95.1@82.3,9.4 83.6,9.4 86.3,6.7 U16.3@87.3,6.7
PD7_STB: U12.15 U14.8 | length 20
  Top Layer w0.254: v1(44.4,16.4) 44.4,14.2 45.1,13.5 U12.15 ; v1(44.7,24.9) 44.7,26 45.4,26.7 U14.8@46.8,26.7
  Bottom Layer w0.254: v1(44.4,16.4) 44.417,16.417 44.417,19.483 42.9,21 42.9,21.186 42.917,21.203 42.917,21.797 42.907,21.807 42.907,24.207 43.6,24.9 v1(44.7,24.9)
ph_U: 
ph_U_A: C2.2 J1.4 U1.11 | length 20.7
  Top Layer w0.4: C2.2@9.145,43.4 9.145,48.585 9.47,48.91 v1(10.39,48.91)
  Bottom Layer w0.8: v1(10.39,48.91) 10.39,41.99 9.6,41.2 9.6,38.33 J1.4
ph_U_B: C4.2 J2.4 U2.11 | length 20.6
  Top Layer w0.4: C4.2@29.485,43.8 29.485,48.435 30.02,48.97 v1@30.8,48.97
  Bottom Layer w0.8: v1(30.8,49) 30.8,39.62 J2.4
ph_V: 
ph_V_C: C6.2 J3.4 U3.11 | length 20.2
  Top Layer w0.4: C6.2@46.825,44.1 46.825,48.585 47.15,48.91 v1@48.1,48.91
  Bottom Layer w0.8: v1(48.1,48.9) 48.1,39.67 J3.4
ph_V_D: C8.2 J4.4 U4.11 | length 20.3
  Top Layer w0.4: C8.2@69.295,43.9 69.295,48.545 69.62,48.87 v1@70.565,48.87
  Bottom Layer w0.8: v1(70.565,48.865) 70.565,39.675 J4.4
ph_V_shunt: 
ph_W: 
ph_W_E: C10.2 J5.4 U5.11 | length 20.3
  Top Layer w0.4: C10.2@86.585,44 86.585,48.575 86.91,48.9 v1(87.8,48.9)
  Bottom Layer w0.8: v1(87.8,48.9) 87.8,39.78 J5.4
ph_W_F: C12.2 J6.4 U6.11 | length 20.3
  Top Layer w0.4: C12.2@108.515,44.1 108.515,48.565 108.75,48.8 v1(109.8,48.8)
  Bottom Layer w0.8: v1(109.8,48.8) 109.8,40.16 J6.4
ph_W_shunt: 
PSCIN0: U12.32
PSCIN1: U12.3 U15.14 | length 57
  Top Layer w0.254: U12.3 41.2,16.1 43.1,18 46.2,18 46.6,18.4 v1(48.6,18.4) ; v1(77.5,26.4) 80.3,26.4 83.34,23.36 v1(86.04,23.36)
  Bottom Layer w0.254: v1(48.6,18.4) 48.6,22.2 49.6,23.2 53.9,23.2 58.244,27.544 76.356,27.544 v1(77.5,26.4) ; v1(86.04,23.36) U15.14
PSCOUT0A: R74.1 U12.29 | length 24.3
  Top Layer w0.254: U12.29 42.7,20.3 44.088,21.688 58.714,21.688 59.902,20.5 61.6,20.5 62.4,19.7 v1(63.2,19.7)
  Bottom Layer w0.254: v1(63.2,19.7) R74.1@63.2,20.85
PSCOUT0A_link: R74.2 U11.3 | length 4.2
  Top Layer w0.254: v1@63.8,24.375 U11.3
  Bottom Layer w0.254: R74.2 63.3,23.25 63.3,23.9 63.795,24.395 v1(63.795,24.375)
PSCOUT0B: R75.1 U12.28 | length 21.2
  Top Layer w0.254: U12.28 43.5,20.4 44.344,21.244 58.256,21.244 59.8,19.7 v1(61.2,19.7)
  Bottom Layer w0.254: v1(61.2,19.7) R75.1@61.2,20.85
PSCOUT0B_link: R75.2 U11.2 | length 4.7
  Top Layer w0.254: v1(61.2,24.3) 62,24.3 62.525,24.825 U11.2@62.525,26.495
  Bottom Layer w0.254: R75.2@61.2,22.85 v1(61.2,24.3)
PSCOUT1A: R72.1 U12.30 | length 29.3
  Top Layer w0.254: U12.30 41.9,20.2 42.483,20.783 42.497,20.783 42.917,21.203 42.917,21.217 43.832,22.132 58.898,22.132 60.03,21 65.8,21 66.2,20.6 v1(66.2,19.7)
  Bottom Layer w0.254: v1(66.2,19.7) 66.2,20.05 R72.1@67,20.85
PSCOUT1A_link: R72.2 U11.5 | length 3.9
  Top Layer w0.254: v1@66.34,24.375 U11.5
  Bottom Layer w0.254: R72.2@66.335,22.565 v1(66.335,24.375)
PSCOUT1B: R73.1 U12.27 | length 24.7
  Top Layer w0.254: U12.27 44.3,20.1 45,20.8 57.772,20.8 59.872,18.7 63.4,18.7 64.4,19.7 v1(65.1,19.7)
  Bottom Layer w0.254: R73.1@65.065,21 65.1,20.965 v1(65.1,19.7)
PSCOUT1B_link: R73.2 U11.4 | length 3.7
  Top Layer w0.254: v1@65.07,24.375 U11.4
  Bottom Layer w0.254: R73.2@65.065,22.785 v1(65.065,24.375)
PSCOUT2A: R70.1 U12.8 | length 36.3
  Top Layer w0.254: U12.8 39.6,12.1 40.4,12.9 v1(40.9,12.9)
  Bottom Layer w0.254: v1(40.9,12.9) 41.9,12.9 42.217,13.217 46.613,13.217 51.796,18.4 69.2,18.4 70,19.2 70,20.6 70.25,20.85 R70.1@70.8,20.85
PSCOUT2A_link: R70.2 U11.7 | length 4.7
  Top Layer w0.254: U11.7 68.88,25.12 69.7,24.3 v1(70.5,24.3)
  Bottom Layer w0.254: R70.2@70.5,22.9 v1(70.5,24.3)
PSCOUT2B: R71.1 U12.9 | length 36.6
  Top Layer w0.254: v1(39.5,10.1) 39.9,10.1 U12.9@40.2,10.4
  Bottom Layer w0.254: v1(39.5,10.1) 39.5,12.6 40.617,13.717 46.413,13.717 51.596,18.9 67.8,18.9 68.5,19.6 68.5,20.45 R71.1@68.9,20.85
PSCOUT2B_link: R71.2 U11.6 | length 3.9
  Top Layer w0.254: U11.6 67.61,25.09 v1(68.4,24.3)
  Bottom Layer w0.254: R71.2@68.4,22.9 v1(68.4,24.3)
RESET: C32.2 J9.5 R66.2 U12.31 | length 26.3
  Top Layer w0.254: J9.5@24.228,9.78 24.228,13.228 25.4,14.4 25.4,15.3 25.7,15.6 34.6,15.6 34.925,15.925 34.925,18.125 36.3,19.5 39.1,19.5 40,20.4 40.8,20.4 41.1,20.1 U12.31
retainer: 
RXCAN: R69.2 U14.4 | length 25.4
  Top Layer w0.254: v1(30.6,11) R69.2@31.75,11 ; v1(39.4,22.9) U14.4@40.59,22.9
  Bottom Layer w0.254: v1(30.6,11) 31.5,11.9 31.5,13.7 29.9,15.3 29.9,22.3 31.7,24.1 38.2,24.1 v1(39.4,22.9)
RXCAN_link: R69.1 U12.7 | length 6.2
  Top Layer w0.254: R69.1@33.5,11.2 35.2,11.2 36.9,12.9 U12.7
SCK: J9.3 R96.2 U12.12 | length 69.7
  Top Layer w0.254: J9.3@26.768,10.68 26.768,9.332 27.4,8.7 30.4,8.7 31.5,7.6 32.9,7.6 36.808,11.508 39.708,11.508 40.2,12 v1(42.7,12) U12.12
  Bottom Layer w0.254: v1(42.7,12) 43.417,12.717 46.913,12.717 52.096,17.9 77.1,17.9 78,17 78,14.7 79.1,13.6 79.1,8.7 79.9,7.9 R96.2
SCK_HV: U9.7 U16.15 | length 11.2
  Top Layer w0.254: U9.7@94.7,13.1 94.7,11.1 95,10.8 v1(96.5,10.8)
  Bottom Layer w0.254: U16.15 93.37,5.47 96.5,8.6 v1(96.5,10.8)
SCK_link: R96.1 U16.2 | length 6
  Bottom Layer w0.254: R96.1@81.9,7.5 83.7,7.5 85.7,5.5 U16.2@87.1,5.5
shunt_+5V: 
shunt_b_5v: 
shunt_b_gnd: 
shunt_b_sig: J11.3 R78.2 | length 38.6
  Top Layer w0.254: R78.2 55.3,15.45 55.3,9.9 55.9,9.3 60.5,9.3 62.3,7.5 65.8,7.5 72.5,14.2 72.5,18.879 71.7,19.679 71.7,23.68 J11.3
shunt_dc_adc: C56.1 R78.1 U12.22 | length 8.4
  Top Layer w0.254: U12.22 48.1,16.1 49.5,17.5 R78.1@55.1,17.5
shunt_gnd: 
shunt_series_V: 
shunt_series_W: 
shunt_sig_link: 
shunt_sig_V: J10.1 R76.2 | length 22.5
  Top Layer w0.254: R76.2 55.55,4 73.4,4 74.61,2.79 J10.1
shunt_sig_W: J10.4 R77.2 | length 28.4
  Top Layer w0.254: R77.2@56.1,5.4 56.983,4.517 73.683,4.517 74.317,3.883 76.097,3.883 76.114,3.9 76.786,3.9 76.803,3.883 77.397,3.883 77.414,3.9 78.086,3.9 78.103,3.883 78.697,3.883 78.714,3.9 80.7,3.9 82.23,2.37 J10.4
shunt_v_adc: C55.1 R76.1 U12.17 | length 10.6
  Top Layer w0.254: U12.17 48.8,12.1 49.3,11.6 49.3,9.5 51.9,6.9 R76.1@54.5,6.9
shunt_w_adc: C54.2 R77.1 U12.18 | length 13.2
  Top Layer w0.254: U12.18 48.7,12.9 49.8,11.8 49.8,9.728 50.928,8.6 55.2,8.6 55.899,7.901 R77.1@55.899,6.599
SS1: 
SS2: 
STB: 
SW1: 
SW2: 
temp_a: J8.1 R63.1 U12.13 | length 21.5
  Top Layer w0.254: R63.1 34.35,4.35 ; J8.1@38.7,1.3 36.5,3.5 35.2,3.5 34.35,4.35 ; v1(40.4,7.6) 35.5,7.6 35,7.1 35,5 34.35,4.35 ; v1(43.5,9) U12.13@43.5,10.8
  Bottom Layer w0.254: v1(40.4,7.6) 42.1,7.6 v1(43.5,9)
temp_b: 
temp_gnd: 
temp_sig: 
TXCAN: R65.2 U14.1 | length 24.6
  Top Layer w0.254: v1(30.6,13.2) R65.2@31.75,13.2 ; v1(34.4,25.1) 34.4,26 35.1,26.7 U14.1@40.6,26.7
  Bottom Layer w0.254: v1(30.6,13.2) 29.2,14.6 29.2,22.3 32,25.1 v1(34.4,25.1)
TXCAN_link: R65.1 U12.6 | length 5.9
  Top Layer w0.254: R65.1@33.3,13.2 35.9,13.2 36.4,13.7 U12.6
V_FB: 
VBS_A: C2.1 D3.1 U1.13 | length 6.3
  Top Layer w0.4: C2.1@11.685,44 U1.13 ; C2.1@11.7,43.06 D3.1@15.1,43.06
VBS_B: C4.1 D6.1 U2.13 | length 7.3
  Top Layer w0.4: U2.13 32.025,43.175 32.15,43.05 D6.1
VBS_C: C6.1 D9.1 U3.13 | length 5
  Top Layer w0.4: C6.1@49.365,45.245 U3.13 ; C6.1@49.75,43.15 D9.1
VBS_D: C8.1 D12.1 U4.13 | length 5.2
  Top Layer w0.4: C8.1@71.835,45.205 U4.13 ; C8.1@72.2,43 D12.1@75.8,43
VBS_E: C10.1 D15.1 U5.13 | length 7.2
  Top Layer w0.4: U5.13 89.125,43.175 C10.1@89.3,43 ; C10.1@89.3,43.15 D15.1@92.6,43.15
VBS_F: C12.1 D18.1 U6.13 | length 7.3
  Top Layer w0.4: U6.13 111.055,43.345 111.25,43.15 D18.1
XTAL1: C28.2 U12.10 Y1.1 | length 5.8
  Top Layer w0.254: Y1.1@41.2,4.9 U12.10@41.2,10.75
XTAL2: C48.1 U12.11 Y1.2 | length 10.7
  Top Layer w0.254: U12.11 41.9,8.2 42.2,7.9 45,7.9 C48.1@45.6,8.5 ; Y1.2@45.6,4.8 46.2,5.4 C48.1@46.2,8.6
pads on no net: J12. J13. J13.3 PS1.7 PS1.10 PS2.1 PS2.9 PS2.11 U1.8 U1.9 U1.10 U1.14 U2.8 U2.9 U2.10 U2.14 U3.8 U3.9 U3.10 U3.14 U4.8 U4.9 U4.10 U4.14 U5.8 U5.9 U5.10 U5.14 U6.8 U6.9 U6.10 U6.14 U12.24 U15.3 U15.5 U15.12 U16.5 U16.6 U16.7 U16.10 U16.11 U16.12

## Polygon pours and split planes (outlines as drawn)
GND_HV on Bottom Layer "Top Layer-No Net 1" (solid, remove dead copper, pour order 2): 0.3,14.5 14.4,14.5 19.4,19.5 19.4,30.9 92,30.9 92,4.1 118.4,4.1 118.4,58 0.3,58
GND_GLV on Bottom Layer "Bottom GLV GND" (solid, remove dead copper, pour order 12): 35.078,3.8 89.4,3.8 89.4,28.6 88,28.6 71.9,28.6 21.6,28.6 21.6,12.3 21.6,18.6 15.3,12.3 0.6,12.3 0.6,4.7 1.5,3.8

## Silkscreen, mask and mechanical layers (free items; w line width, h text height)
Top Overlay:
  lines w0.2: 74.7,3.7 76.7,3.7 ; 74.7,12.4 76.7,12.4 ; 77.7,3.7 79.7,3.7 ; 77.7,12.4 79.7,12.4 ; 80.7,3.7 82.7,3.7 ; 80.7,12.4 82.7,12.4 ; 83.8,12.4 85.8,12.4 ; 86.9,3.7 88.9,3.7 ; 86.9,12.4 88.9,12.4 ; 90.1,3.8 90.1,5.8 ; 90.1,6.9 90.1,8.9 ; 90.1,10.2 90.1,12.2 ; 101.3,20.5 101.3,22.5 ; 101.3,23.5 101.3,25.5 ; 101.3,26.5 101.3,28.5 ; 101.3,29.6 101.3,31.6 ; 102.2,34.7 104.2,34.7 ; 105.5,34.7 107.5,34.7 ; 108.8,34.7 110.8,34.7 ; 111.9,34.7 113.9,34.7 ; 114.8,20.5 114.8,22.5 ; 114.8,23.5 114.8,25.5 ; 114.8,26.5 114.8,28.5 ; 114.8,29.6 114.8,31.6 ; 114.8,32.7 114.8,34.7
  lines w0.254: 27.621,20.459 27.621,21.856 ; 29.079,22.237 29.841,22.999 30.603,22.237 ; 32.193,20.459 32.193,21.856 ; 33.397,22.237 34.159,22.999 34.921,22.237 ; 26.986,19.951 26.986,28.4 36.384,28.4 36.384,19.951 26.986,19.951 ; 35.8,3.5 35.8,7.3 50.9,7.3 50.9,3.5 35.8,3.5
  lines w0.4: 29,13.3 29,13.7 29.7,13.7 29.7,13.3 29,13.3 ; 29,13.3 29,13.3
  lines w2: 1.1,13.4 14.8,13.4 20.5,19.1 20.5,29.786 90.6,29.786 90.5,4.8 90.6,29.7
  text "HV" at 58.28,44.05 h1.2
  text "QUTMS Inverter Driver v3.6" at 20.9,31.5 h1.5
  text "GLV Boundary" at 77.9,27.1 h1.2
  text "Encoder/ Temp" at 118.4,23.9 h1.2 r90
  text "Power" at 34.733,23.38 h1.2 r90
  text "Status" at 30.4,23.3 h1.2 r90
  text "Control" at 62.2,16 h1.2
Bottom Overlay:
  lines w2: 1.2,13.4 14.8,13.4 20.482,19.082 20.482,29.8 72.7,29.8 ; 56.9,29.8 90.6,29.8 90.6,4.8
Mechanical 1:
  lines w0.254: 0,14.5 ccw(c1,14.5) 1,13.5 cw(c1,12.5) 2,12.5 ; 0,4.4 ccw(c1,4.4) 1,3.4 33.39,3.4 cw(c33.39,2.4) 34.39,2.4 34.39,1 ccw(c35.39,1) 35.39,0 40.6,0 ccw(c40.6,1) 41.6,1 41.6,2.4 cw(c42.6,2.4) 42.6,3.4 71.91,3.4 cw(c71.91,2.4) 72.91,2.4 72.91,1 ccw(c73.91,1) 73.91,0 82.9,0 ccw(c82.9,1) 83.9,1 83.9,2.6 cw(c84.9,2.6) 84.9,3.6 115.77,3.6 ccw(c115.77,4.6) 116.77,4.6 116.77,12.5 cw(c117.77,12.5) 117.77,13.5 ccw(c117.77,14.5) 118.77,14.5 118.77,58.36 0,58.36 0,4.4